# Altium PCB PCB.PcbDoc
Units mil, origin at the board's own origin, x right, y up, seen from the top; angles counter-clockwise.
Board outline 3543.31 x 2362.2 mil, 2 copper layers (Top Layer, Bottom Layer); 12 components, 12 nets, 55 pads, 9 vias.
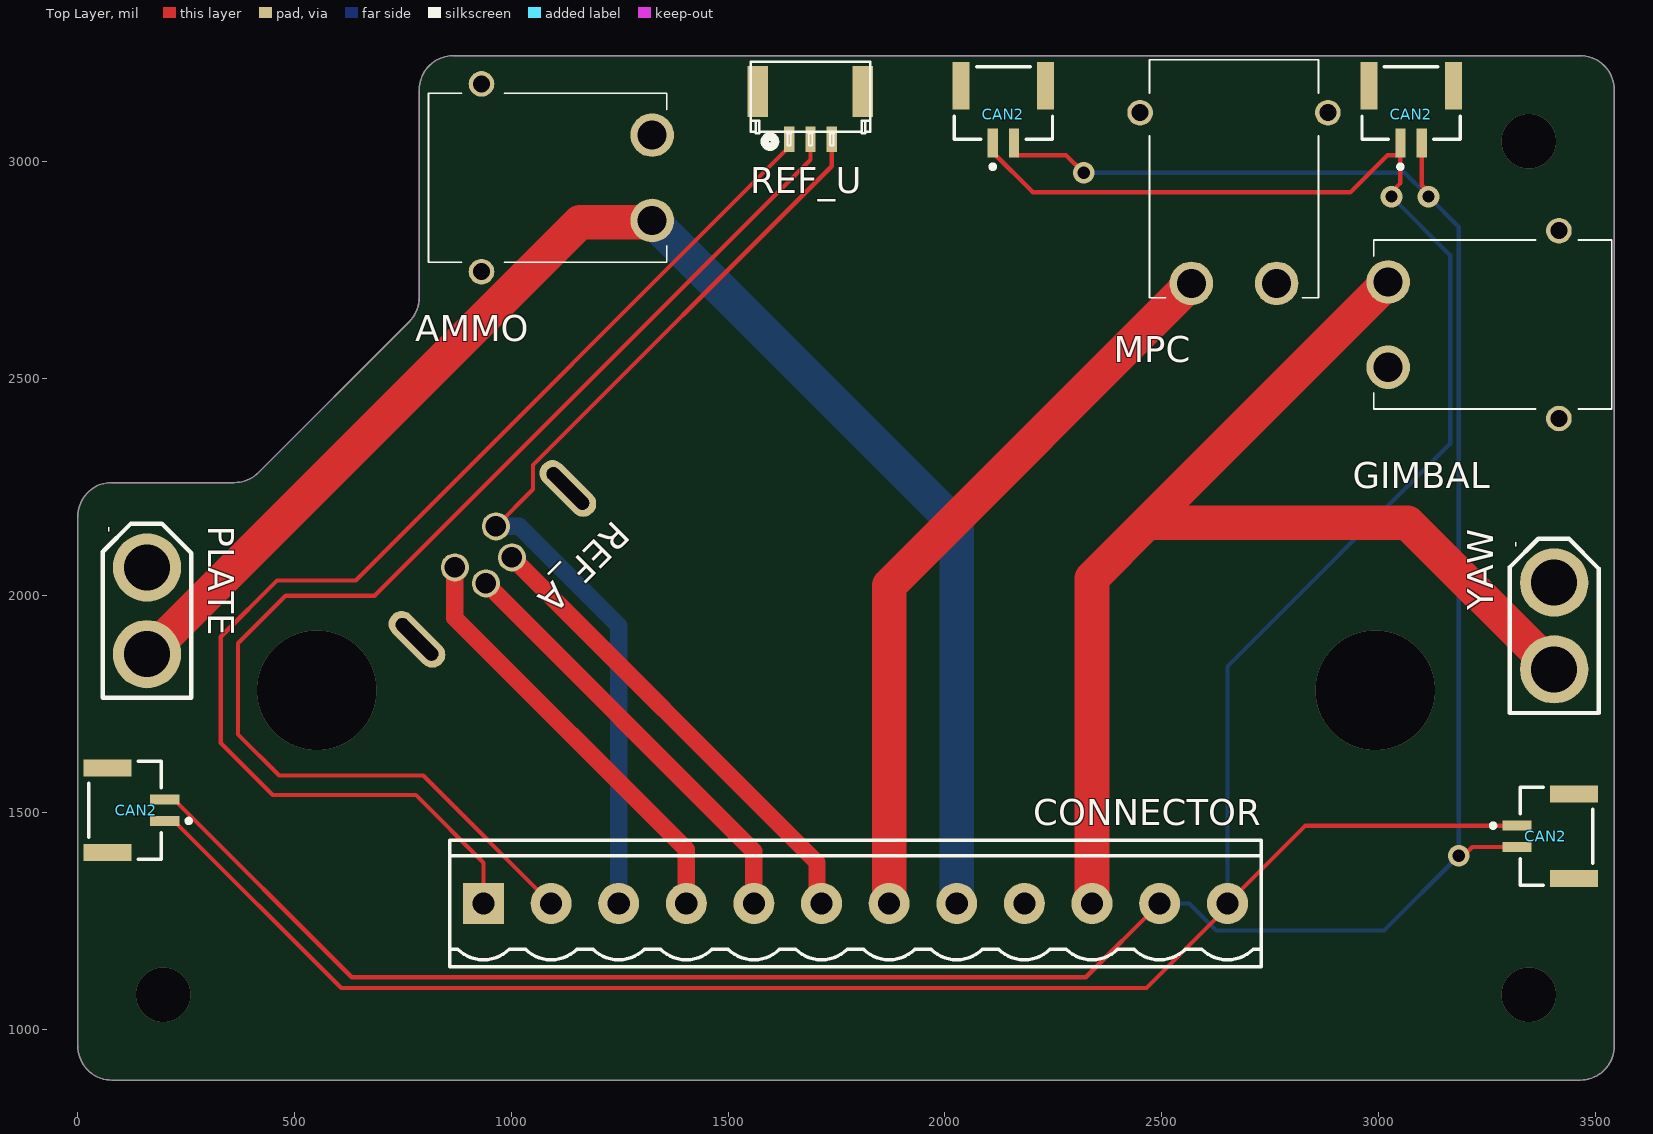
[diagram p0: Top Layer view]
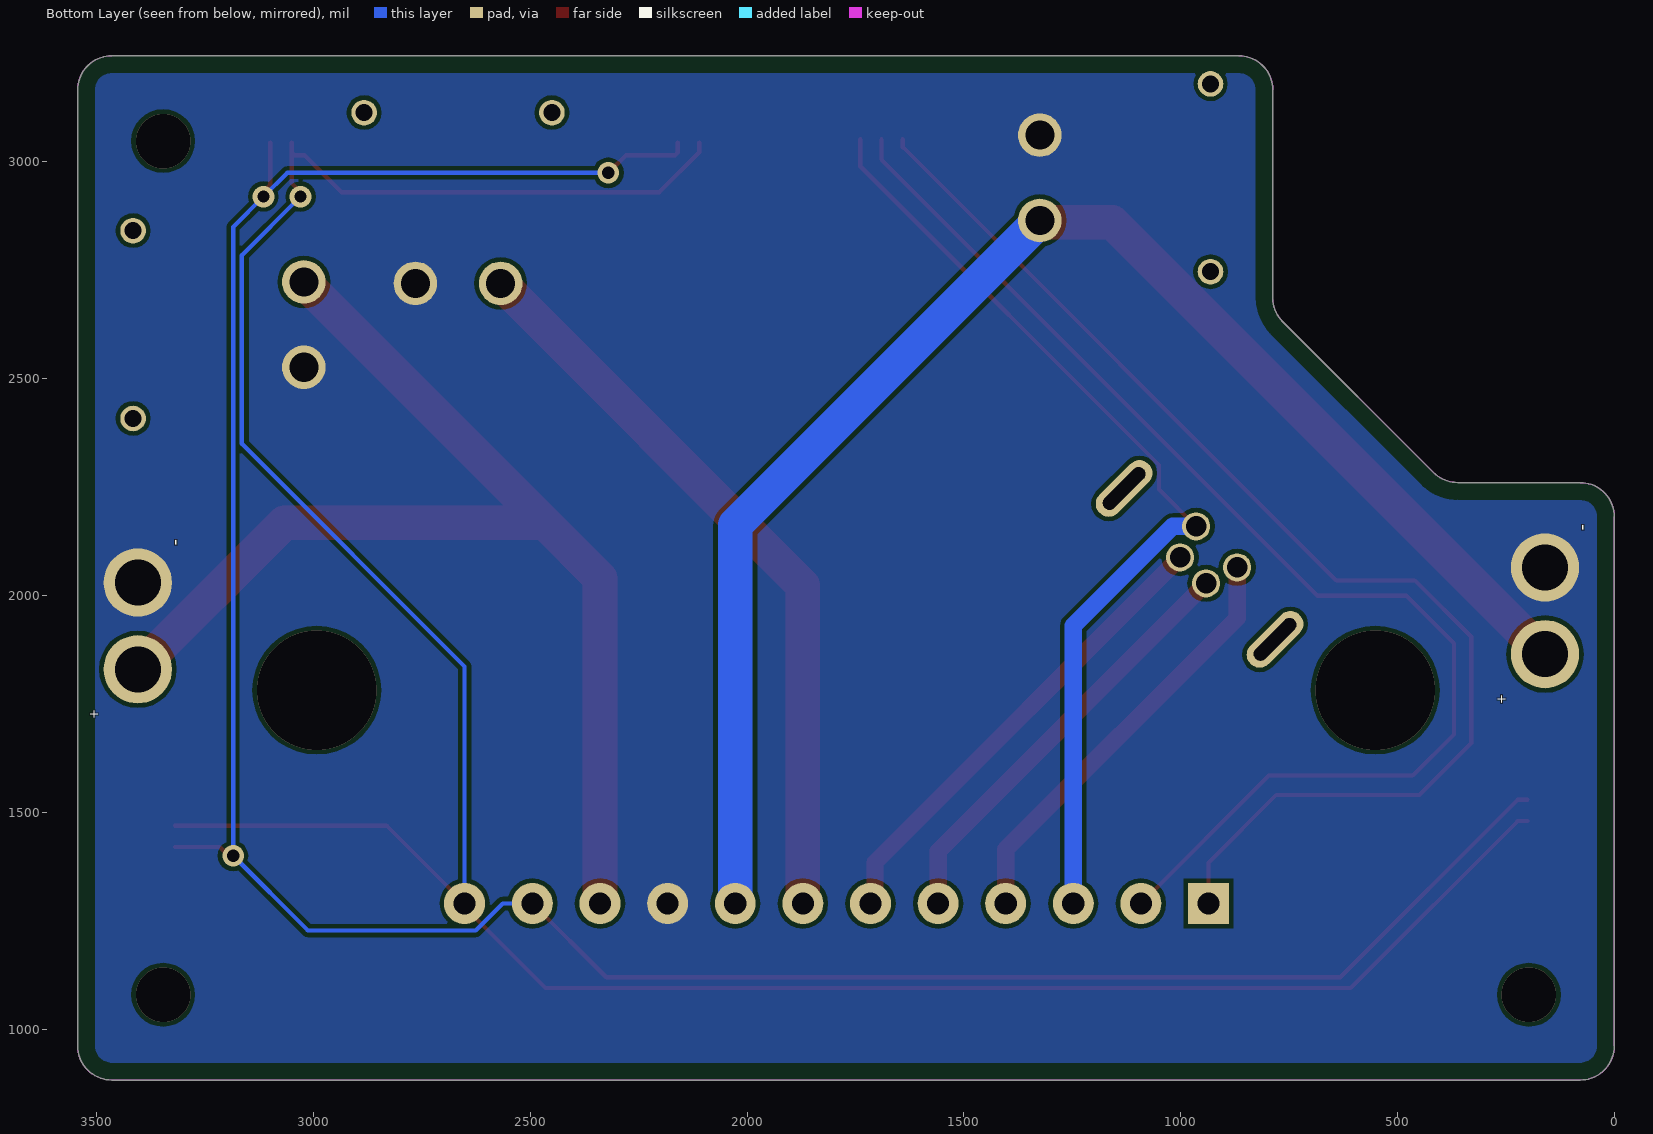
[diagram p1: Bottom Layer view, seen from below]

## Layer stack, top to bottom
Top Solder: solder mask 0.4, Solder Resist, Dk 3.5
Top Layer: signal copper 1.4
Dielectric 1: dielectric 12.6, FR-4, Dk 4.8
Bottom Layer: signal copper 1.4
Bottom Solder: solder mask 0.4, Solder Resist, Dk 3.5

## Board outline
0.25,961.5 0.25,2181.97 cw(c78.99,2181.97) 78.99,2260.71 361.34,2260.71 ccw(c361.34,2339.45) 417.01,2283.78 764.59,2631.35 ccw(c708.91,2687.03) 787.65,2687.03 787.65,3166.23 cw(c866.39,3166.23) 866.39,3244.97 3464.82,3244.97 cw(c3464.82,3166.23) 3543.56,3166.23 3543.56,961.5 cw(c3464.82,961.5) 3464.82,882.76 78.99,882.76 cw(c78.99,961.5)

## Design rules (kind name [scope] priority, off if disabled: settings)
BoardOutlineClearance [All] p1: gap=40 ignorepadtopadclearanceinfootprint=FALSE
Clearance [All] p1: gap=10 ignorepadtopadclearanceinfootprint=FALSE except(0: Arc-Hole Track-Hole SMDPad-Hole THPad-Hole Via-Hole Fill-Hole Poly-Hole Region-Hole Text-Hole)
PlaneConnect [All] p1: planeconnectstyle=Direct reliefexpansion=20 reliefentries=4 reliefconductorwidth=10 reliefairgap=10
PolygonConnect [All] p1: connectstyle=Direct reliefconductorwidth=10 reliefentries=4 polygonreliefangle="90 Angle" airgapwidth=10
RoutingVias [All] p1: holewidth=28 width=50 viastyle="Through Hole" minholewidth=28 minwidth=50 maxholewidth=28 maxwidth=50
SolderMaskExpansion [All] p1: expansion=4 istentingtop=FALSE
Width [All] p1: maxlimit=80 minlimit=10 preferedwidth=40 minimp=50.000000 maximp=50.000000 favimp=50.000000
29 further rules are at their usual default settings.

## Classes and differential pairs
component class ChassisPCBSchematic: AMMO CAN2 CONNECTOR GIMBAL MPC PLATE REF_A REF_U YAW

## Components (designator, comment, footprint, x,y, rotation, side; value= is the part's Value field where it differs from the comment)
AMMO "XT30PW-M" XT30PWM 1092.24,2963.43 r90 top
CAN2 "CAN2" JST-BM02B-GHS-TBT_V 135,1505 r90 top
CAN2 "CAN2" JST-BM02B-GHS-TBT_V 3075,3110 r0 top
CAN2 "CAN2" JST-BM02B-GHS-TBT_V 2135,3110 r0 top
CAN2 "CAN2" JST-BM02B-GHS-TBT_V 3385,1445 r270 top
CONNECTOR "HDR-1X12" HT3.96-LI-12P 1794.21,1290 r0 top
GIMBAL "XT30PW-M" XT30PWM 3255,2625 r270 top
MPC "XT30PW-M" XT30PWM 2666.57,2952.76 r0 top
PLATE "XT PLUGIN" XT30-M 160,1965 r90 top
REF_A "Referee_Air" "M8 Connector" 943.77,2085.88 r225 top
REF_U "gh1.25_3p" GH1.25-LS-3P 1690,3150.42 r180 top
YAW "XT PLUGIN" XT30-M 3405,1930 r90 top

## Footprints (in the part's own frame and the unit in brackets; to place one, negate y for a bottom-side part, rotate by r counter-clockwise, add the part's x,y. Pads: shape width x height; smd on the part's side, far side on the other; paste and mask are expansions set on the pad)
GH1.25-LS-3P [mm] "A1257WR-S-3P"
  rect 1.2x3 smd: 0(-3.075,-0.3) 0(3.075,-0.3)
  rect 0.6x1.5 smd: 1(1.25,2.5) 2(0,2.5) 3(-1.25,2.5)
  silkscreen extent -3.5,-2.05 3.5,2.93, body extent -3.5,-2.15 3.5,2.25, height 4.2
HT3.96-LI-12P [mm] "HT3.96立插端子 淘宝ID:黄晶宝石   店铺网址:https://shop463601444.taobao.com"
  rect 2.4x2.4 hole 1.3: 1(-21.8,0)
  round 2.4 hole 1.3: 2(-17.84,0) 3(-13.88,0) 4(-9.92,0) 5(-5.96,0) 6(-2,0) 7(1.96,0) 8(5.92,0) 9(9.88,0) 10(13.84,0) 11(17.8,0) 12(21.78,0)
  silkscreen extent -23.78,-3.7 23.76,3.7, body extent -23.8,-3.7 23.78,3.7, height 10.05
JST-BM02B-GHS-TBT_V [mm] "Connector, 2-Leads, Body 5.75x4.25mm, Pitch 1.25mm"
  rect 0.6x1.7 smd: 1(-0.625,-1.675) 2(0.625,-1.675)
  rect 1x2.8 smd: MP1(-2.475,1.675) MP2(2.475,1.675)
  silkscreen extent -2.88,-3.2 2.88,2.78, body extent -2.88,-2.17 2.87,2.78, height 4.21
"M8 Connector" [mm]
  round 1.65 hole 1.2: 0(-1.075,1) 1(1.075,1) 2(-1.7,-0.95) 3(1.7,-0.95)
  oval 1.524x4.064 hole 0.8 slot 3.2 at 90 deg: 4(-6.25,0.46) 5(6.25,0.46)
  body extent -6.25,-19.34 6.25,1.96, height 11.3
XT30-M [mm]
  round 4 hole 2.7: 1(-2.54,0) 2(2.54,0)
  silkscreen extent -5.1,-2.6 5.11,2.6, body extent -5.18,-2.8 5.02,2.8, height 10.66
XT30PWM [mm]
  round 2.55 hole 1.7: 1(-2.5,-5.912) 2(2.5,-5.912)
  round 1.5 hole 1: 3(5.5,4.088) 4(-5.5,4.088)
  silkscreen extent -4.95,-6.76 4.95,7.19, body extent -6.65,-6.71 6.65,7.24, height 5.06

## Part data
AMMO GIMBAL MPC: "Connector", Manufacturer_Name=Amass, Datasheet Link=https://www.tme.eu/sl/Document/ce4077e36b79046da520ca73227e15de/XT30PW%20SPEC.pdf, Height=5mm, Manufacturer_Part_Number=XT30PW-M
CAN2 CAN2 CAN2 CAN2: library part CMP-2000-05957-1, "Disconnectable Crimp Style Connector, Pitch 1.25 mm, 1 x 2 Position, Height 4.05 mm, -25 to 85 degC, RoHS, Tape and Reel", Color=Natural, Manufacturer=JST-Sales-America-Inc., Package Description="Disconnectable Crimp Style Connector, Pitch 1.25 mm, 1 x 2 Position, Height 4.05 mm", Package Reference=BM02B-GHS-TBT, Category=Connectors,Interconnects, Connector Type=Header,Shrouded, Contact Finish=Tin, Contact Finish Thickness=-, Contact Mating Length=-, Contact Type=OuterShroudContact, Datasheet URL=http://www.jst-mfg.com/product/pdf/eng/eGH.pdf, Datasheet Version=05/2016, Family=RectangularConnectors-Headers,MalePins, Fastening Type=LockingRamp, Features=SolderRetention, Manufacturer URL=http://www.jst.com/home2.html, Mounting Technology=SurfaceMount, Mounting Type=SurfaceMount, Number of Positions=2, Number of Positions Loaded=All, Number of Rows=1, Packaging=Digi-Reel®, Pitch="0.049\"(1.25mm)", Row Spacing=-, Series=GH, Termination=Solder
CONNECTOR: library part "Header 12", "12P接插件", BOM名称=12P接插件, 学习资源=https://shop463601444.taobao.com, 版权归属="封装库来自淘宝卖家 ID：黄晶宝石"

## Via types
v1: diameter 50, hole 28, Top Layer to Bottom Layer, 4 vias
v2: diameter 125.98, hole 125.98, Top Layer to Bottom Layer, 3 vias
v3: diameter 275.59, hole 275.59, Top Layer to Bottom Layer, 2 vias

## Nets (pads, with @x,y where several pads share a name; then routed paths per layer and width w, separated by ;. In a path a pad name is that pad's centre, name@x,y a point inside that pad or via, vN(x,y) a via of type N, cw(c..) or ccw(c..) an arc to the next point about the centre after c; other vN are vias at no path point)
AMMO_DC: AMMO.1 CONNECTOR.8 PLATE.1 | length 3445.1
  Top Layer w80: PLATE.1 161.88,1865 1157.98,2861.1 1321.1,2861.1 AMMO.1
  Bottom Layer w80: AMMO.1 2027.28,2162.72 CONNECTOR.8
CAN2_H: CAN2.2 CONNECTOR.11 | length 6162.7
  Top Layer w10: CAN2.2@200.94,1529.61 222.6,1529.61 632.2,1120 2325,1120 CONNECTOR.11 ; CAN2.2@2159.61,3044.06 2159.61,3022.4 2166.42,3015.59 2279.41,3015.59 v1(2320,2975) ; CAN2.2@3099.61,3044.06 3099.61,2946.22 3115,2930.82 v1(3115,2920) ; v1(3185,1400) 3195.82,1400 3216.22,1420.39 CAN2.2@3319.06,1420.39
  Bottom Layer w10: v1(2320,2975) 3060,2975 v1(3115,2920) 3185,2850 v1(3185,1400) 3012.76,1227.76 2625.91,1227.76 2563.66,1290 CONNECTOR.11
CAN2_L: CAN2.1 CONNECTOR.12 | length 6507
  Top Layer w10: CAN2.1@200.94,1480.39 222.6,1480.39 607.99,1095 2465,1095 2651.69,1281.69 CONNECTOR.12 2831.3,1469.61 CAN2.1@3319.06,1469.61 ; CAN2.1@2110.39,3044.06 2110.39,3022.4 2202.8,2930 2935,2930 3020.59,3015.59 3043.58,3015.59 CAN2.1@3050.39,3022.4 ; v1(3030,2920) 3030,2930.82 3050.39,2951.22 CAN2.1@3050.39,3022.4 ; CAN2.1@3050.39,3044.06 CAN2.1@3050.39,3022.4
  Bottom Layer w10: CONNECTOR.12 2651.69,1836.69 3165,2350 3165,2785 v1(3030,2920)
GIMBAL_DC: CONNECTOR.10 GIMBAL.1 YAW.1 | length 2794.5
  Top Layer w80: CONNECTOR.10 2339.09,2040.28 2466.91,2168.09 ; GIMBAL.1 2466.91,2168.09 ; YAW.1 3066.91,2168.09 2466.91,2168.09
GND: AMMO.2 CONNECTOR.9 GIMBAL.2 MPC.2 PLATE.2 YAW.2
MPC_DC: CONNECTOR.7 MPC.1 | length 1718.6
  Top Layer w80: CONNECTOR.7 1871.38,2023.23 MPC.1
REFEREE_A1: CONNECTOR.6 REF_A.0 | length 1093.7
  Top Layer w40: REF_A.0 1705.05,1384.46 1705.05,1300.43 CONNECTOR.6
REFEREE_A2: CONNECTOR.5 REF_A.1 | length 994
  Top Layer w40: REF_A.1 1559.57,1410.23 CONNECTOR.5
REFEREE_A3: CONNECTOR.4 REF_A.3 | length 996
  Top Layer w40: REF_A.3 870,1948.33 1403.66,1414.66 CONNECTOR.4
REFEREE_GND: CONNECTOR.3 REF_A.2 REF_U.3 | length 2231.5
  Top Layer w10: REF_A.2 1050.22,2245.22 1050.22,2301.06 1739.21,2990.06 REF_U.3
  Bottom Layer w40: REF_A.2 1018.21,2159.65 1247.76,1930.11 CONNECTOR.3
REFEREE_UR: CONNECTOR.2 REF_U.2 | length 2922.2
  Top Layer w10: CONNECTOR.2 796.85,1585 465,1585 370,1680 370,1890 480,2000 685,2000 1690,3005 REF_U.2
REFEREE_UT: CONNECTOR.1 REF_U.1 | length 2855.6
  Top Layer w10: CONNECTOR.1 935.94,1384.06 780,1540 450,1540 330,1660 330,1905 460,2035 641.51,2035 1640.79,3034.28 REF_U.1
pads on no net: AMMO.3 AMMO.4 CAN2.MP1 CAN2.MP2 GIMBAL.3 GIMBAL.4 MPC.3 MPC.4 REF_A.4 REF_A.5 REF_U.0
copper on no net:
  other v2: 197.1,1079.61 3346.71,1079.61 3346.71,3048.12
  other v3: 551.43,1781.87 2992.38,1781.87

## Polygon pours and split planes (outlines as drawn)
GND on Bottom Layer "AMMO_GND_Poly" (solid, pour order 0): 625,3855 0,3230 0,595 3580,595 3800,815 3800,3855

## Keep-outs
Keep-Out Layer:
  the board outline again, w0.5

## Silkscreen, mask and mechanical layers (free items; w line width, h text height)
Mechanical 1:
  lines w0.5: 134.11,1079.61 ccw(c197.1,1079.61) 260.09,1079.61 ; 413.64,1781.87 ccw(c551.43,1781.87) 689.23,1781.87 ; 2854.58,1781.87 ccw(c2992.38,1781.87) 3130.17,1781.87 ; 3283.71,1079.61 ccw(c3346.71,1079.61) 3409.7,1079.61 ; 3283.71,3048.12 ccw(c3346.71,3048.12) 3409.7,3048.12 ; 0.25,961.5 ccw(c78.99,961.5) 78.99,882.76 3464.82,882.76 ccw(c3464.82,961.5) 3543.56,961.5 3543.56,3166.23 ccw(c3464.82,3166.23) 3464.82,3244.97 866.39,3244.97 ccw(c866.39,3166.23) 787.65,3166.23 787.65,2687.03 cw(c708.91,2687.03) 764.59,2631.35 417.01,2283.78 cw(c361.34,2339.45) 361.34,2260.71 78.99,2260.71 ccw(c78.99,2181.97) 0.25,2181.97 0.25,961.5

## Text inside footprints (layer, text, board x,y; h text height)
PLATE: Bottom Overlay "-" at 83,2165 h30 r90; Bottom Overlay "+" at 269.24,1772.89 h20 r90; Top Overlay "-" at 83,2145 h30 r90
YAW: Bottom Overlay "-" at 3328,2130 h30 r90; Bottom Overlay "+" at 3514.24,1737.89 h20 r90; Top Overlay "-" at 3328,2110 h30 r90